# Altium PCB PCB1.PcbDoc
Units mm, origin at the board's own origin, x right, y up, seen from the top; angles counter-clockwise.
Board outline 92.71 x 44.7 mm, 2 copper layers (Top Layer, Bottom Layer), stack 1.571 mm thick; 32 components, 36 nets, 220 pads, 9 vias.
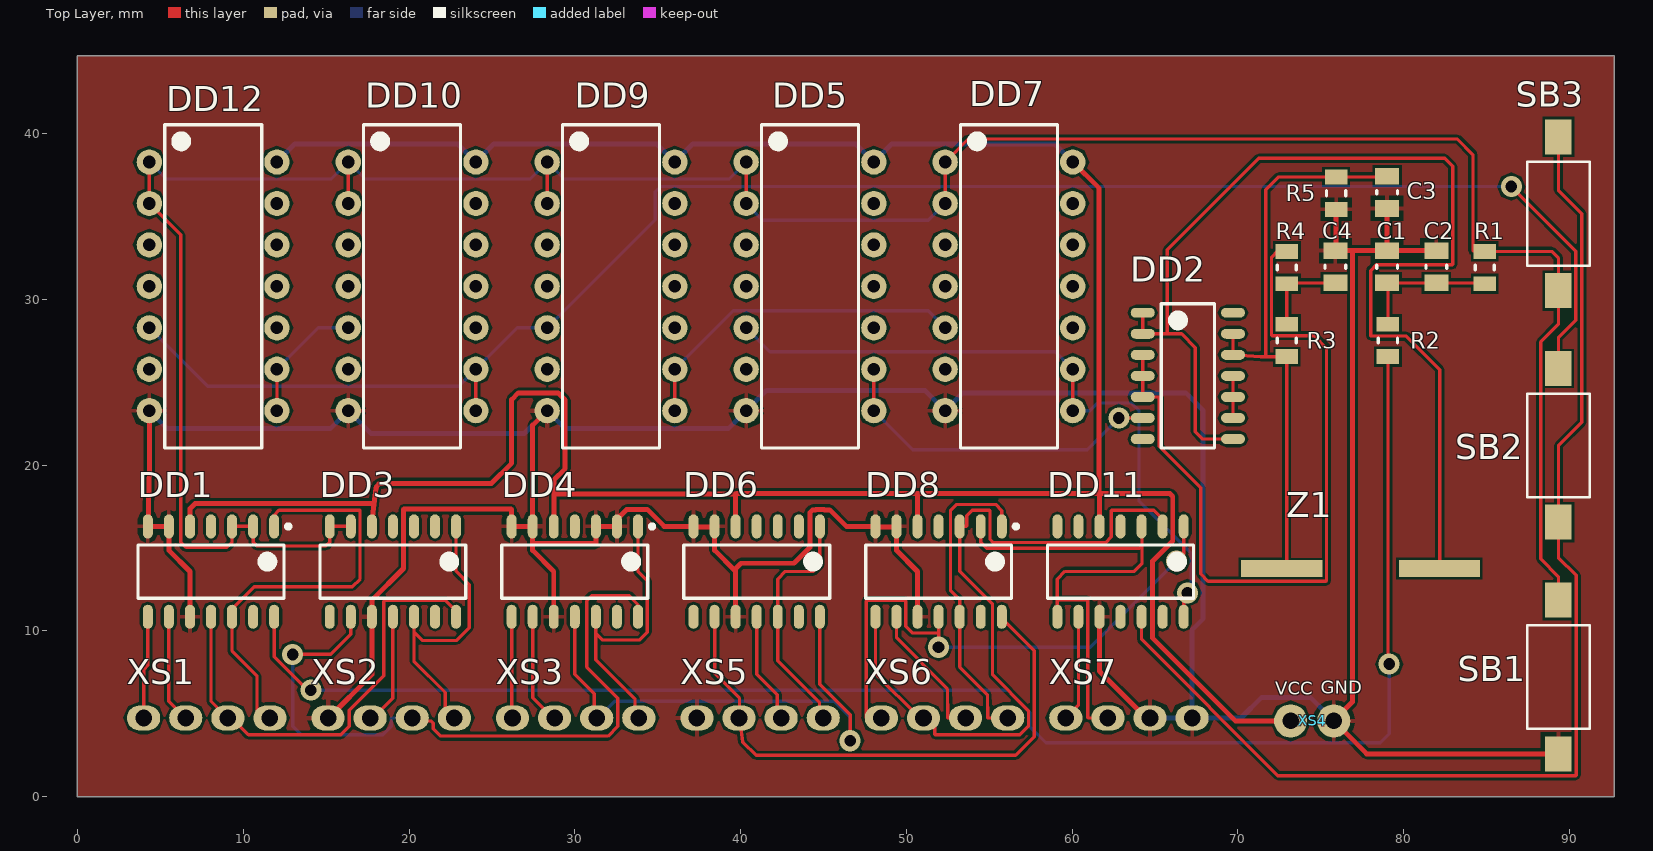
[diagram p0: Top Layer view]
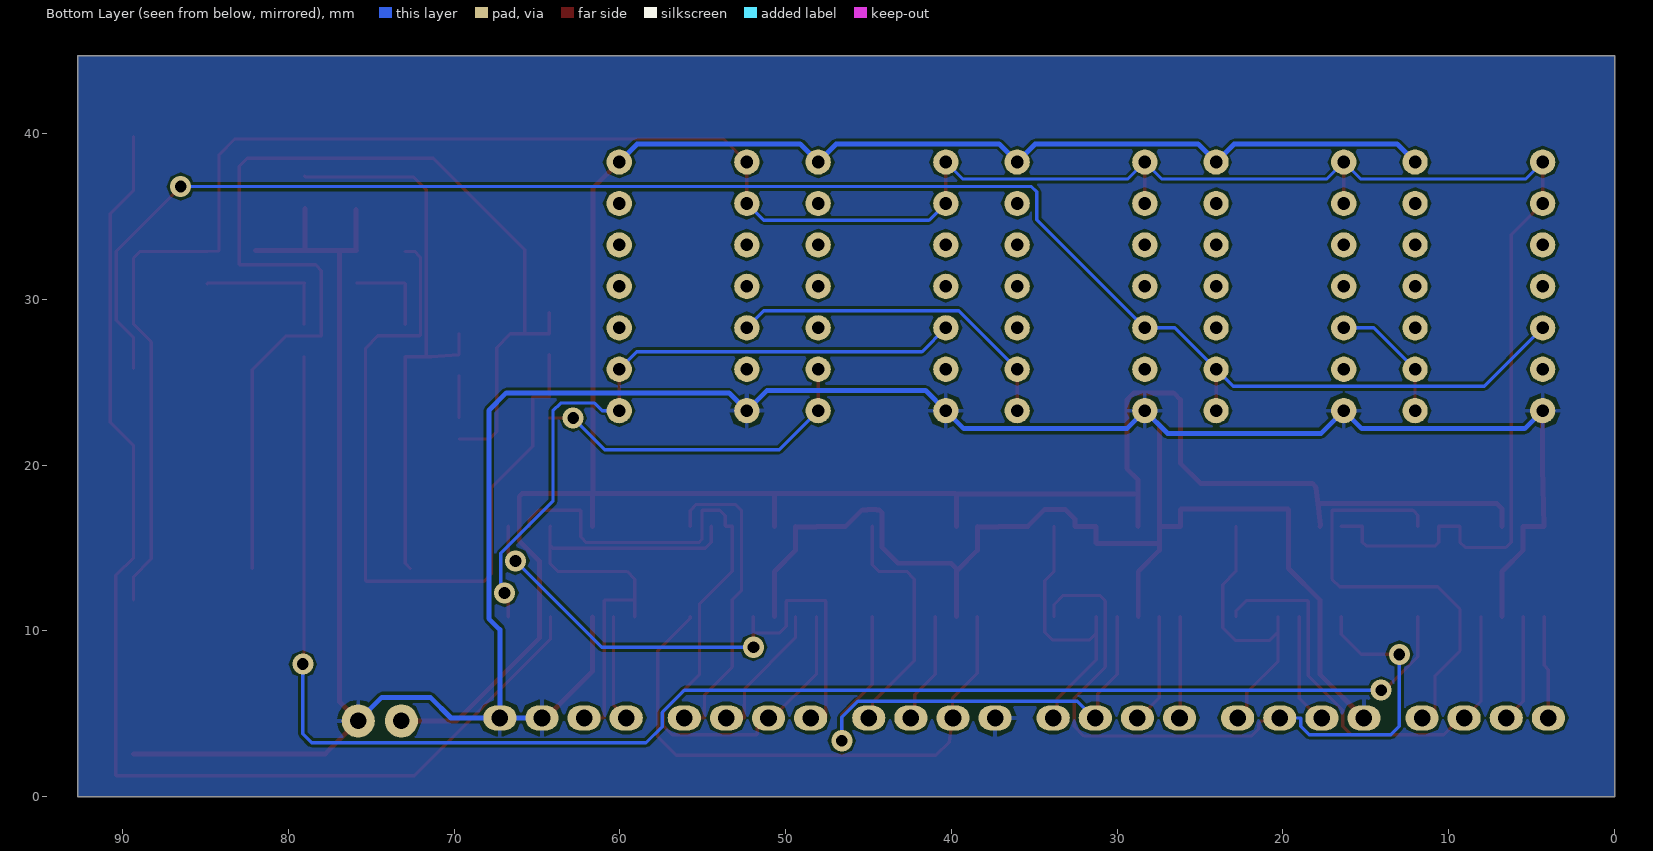
[diagram p1: Bottom Layer view, seen from below]
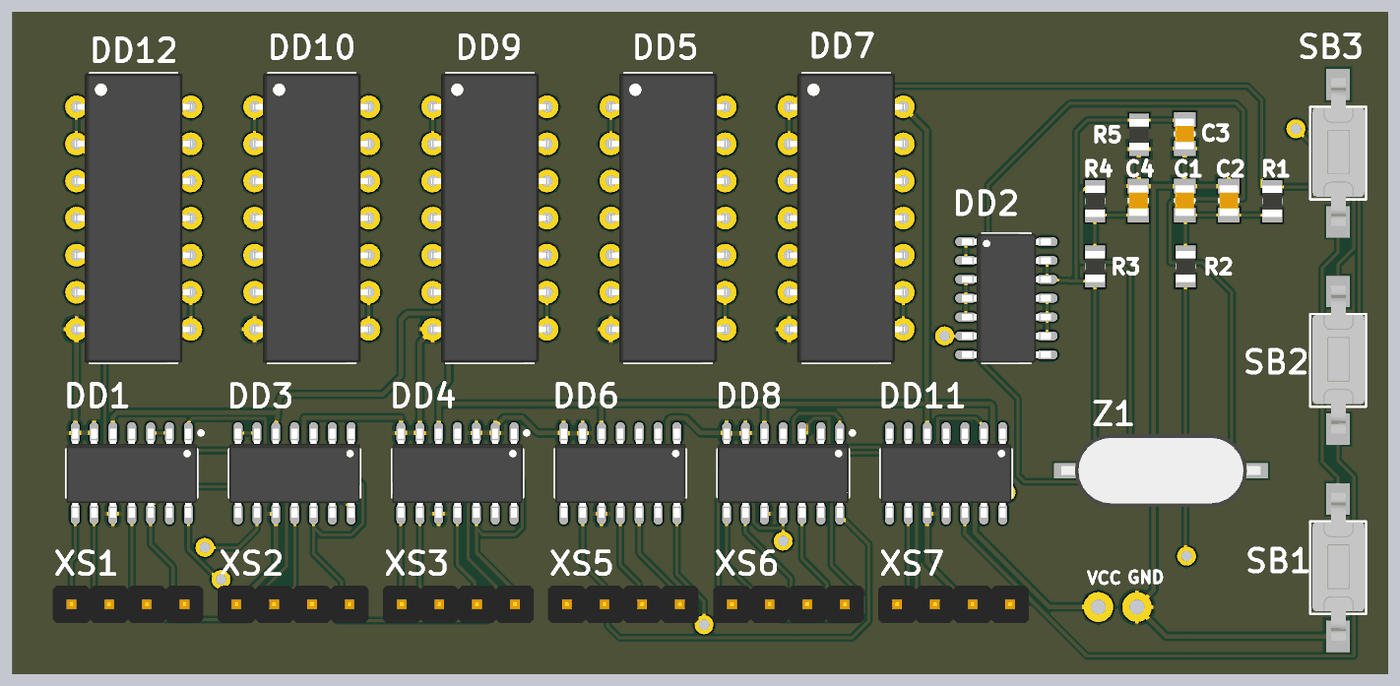
[diagram p2: 3D render of the assembled board from above, using the file's embedded part models]

## Layer stack, top to bottom
Top Solder: solder mask 0.0102, Solder Resist, Dk 3.5
Top Layer: signal copper 0.0356
Dielectric 1: dielectric 1.5, FR-4, Dk 4.8
Bottom Layer: signal copper 0.0356
Bottom Solder: solder mask 0.0102, Solder Resist, Dk 3.5

## Board outline
-0.002,-0.002 92.709,-0.002 92.709,44.703 -0.002,44.703 -0.002,0.072

## Design rules (kind name [scope] priority, off if disabled: settings)
Clearance [All] p1: gap=0.15 ignorepadtopadclearanceinfootprint=FALSE
ComponentClearance [All] p1: gap=0 collisioncheckmode=3 verticalgap=0 showdistances=FALSE
HoleSize [All] p1: absolutevalues=TRUE maxlimit=3 minlimit=0.5 maxpercent=80.000 minpercent=20.000
PolygonConnect [All] p1: connectstyle=Relief reliefconductorwidth=0.254 reliefentries=4 polygonreliefangle="90 Angle" airgapwidth=0.254
RoutingVias [All] p1: holewidth=0.5 width=0.8 viastyle="Through Hole" minholewidth=0.4 minwidth=0.4 maxholewidth=0.6 maxwidth=0.6
SilkToSilkClearance [All] p1: silktosilkclearance=0
SilkToSolderMaskClearance [All] p1: minsilkscreentomaskgap=0 clearancetoexposedcopper=TRUE
SolderMaskExpansion [All] p1: expansion=0.102 istentingtop=FALSE
Width Width_VCC_GND [InNetClass('VCC_GND')] p1: maxlimit=0.3 minlimit=0.3 preferedwidth=0.3
Width [All] p2: maxlimit=0.25 minlimit=0.15 preferedwidth=0.2
26 further rules are at their usual default settings.

## Classes and differential pairs
net class VCC_GND: GND VCC

## Components (designator, comment, footprint, x,y, rotation, side; value= is the part's Value field where it differs from the comment)
C1 "C-0805 16 В 0,033 мкФ 5% X5R Jiayang" C0805 78.995,31.969 r90 top value="0,033 мкФ"
C2 "C-0805 16 В 0,033 мкФ 5% X5R Jiayang" C0805 81.966,31.969 r90 top value="0,033 мкФ"
C3 "C-0805 16 В 91 мкФ 5% X5R Jiayang" C0805 78.995,36.459 r270 top value="0,033 мкФ"
C4 "C-0805 16 В 0,047 мкФ 5% X5R Jiayang" C0805 75.87,31.969 r90 top value="0,033 мкФ"
DD1 "K155ИЕ2 Ukraine" SN7490A 8.052,13.582 r270 top
DD2 "K155ЛА3 Ukraine" CD4011 66.98,25.385 r0 top
DD3 "K155ИЕ4 Ukraine" SN7492A 19.025,13.582 r270 top
DD4 "K155ИЕ2 Ukraine" SN7490A 29.997,13.582 r270 top
DD5 "K155ИЕ1 Ukraine" К155ИЕ1 44.183,30.785 r0 top
DD6 "K155ИЕ4 Ukraine" SN7492A 40.97,13.582 r270 top
DD7 "K155ИЕ1 Ukraine" К155ИЕ1 56.185,30.785 r0 top
DD8 "K155ИЕ2 Ukraine" SN7490A 51.943,13.582 r270 top
DD9 "K155ИЕ1 Ukraine" К155ИЕ1 32.182,30.785 r0 top
DD10 "K155ИЕ1 Ukraine" К155ИЕ1 20.18,30.785 r0 top
DD11 "K155ИЕ5 Ukraine" SN7493 62.916,13.582 r270 top
DD12 "K155ИЕ1 Ukraine" К155ИЕ1 8.179,30.785 r0 top
R1 "R-0805 0,125 Вт 6,8 кОм 5% Vishay" R0805 84.887,31.919 r270 top value="6,8 кОм"
R2 "R-0805 0,125 Вт 6,8 кОм 5% Vishay" R0805 79.045,27.524 r270 top value="6,8 кОм"
R3 "R-0805 0,125 Вт 2 кОм 5% Vishay" R0805 72.949,27.524 r270 top value="6,8 кОм"
R4 "R-0805 0,125 Вт 2 кОм 5% Vishay" R0805 72.949,31.919 r270 top value="6,8 кОм"
R5 "R-0805 0,125 Вт 2 кОм 5% Vishay" R0805 75.92,36.409 r90 top value="6,8 кОм"
SB1 "TS3611-2.5-180-B KLS" SWITCH 89.332,2.591 r90 top
SB2 "TS3611-2.5-180-B KLS" SWITCH 89.332,16.561 r90 top
SB3 "TS3611-2.5-180-B KLS" SWITCH 89.332,30.531 r90 top
XS1 "Pins" PINS 7.798,4.75 r180 top
XS2 "Pins" PINS 18.923,4.75 r180 top
XS3 "Pins" PINS 30.048,4.75 r180 top
XS4 "Power" POWER 74.477,4.572 r0 top
XS5 "Pins" PINS 41.173,4.75 r180 top
XS6 "Pins" PINS 52.299,4.75 r180 top
XS7 "Pins" PINS 63.424,4.75 r0 top
Z1 "SIT1579AC-J3-33E-0001.000000 3.3V 1kHz SiTime" QUARTZ 77.394,13.767 r0 top value=1kHz

## Footprints (in the part's own frame and the unit in brackets; to place one, negate y for a bottom-side part, rotate by r counter-clockwise, add the part's x,y. Pads: shape width x height; smd on the part's side, far side on the other; paste and mask are expansions set on the pad)
C0805 [mm] "Chip Capacitor, 2-Leads, Body 2,10x1,30mm, IPC Medium Density"
  rect 1x1.45 smd: 1(-0.975,0) 2(0.975,0)
  silkscreen extent -0.1,-0.63 0.1,0.63, body extent -1.05,-0.65 1.05,0.65, height 0.4
CD4011 [mm] "SOIC, 14-Leads, Body 8,62x3,90mm, Pitch 1,27mm, IPC Medium Density"
  oval 1.45x0.6 smd: 1(-2.725,3.81) 2(-2.725,2.54) 3(-2.725,1.27) 4(-2.725,0) 5(-2.725,-1.27) 6(-2.725,-2.54) 7(-2.725,-3.81) 8(2.725,-3.81) 9(2.725,-2.54) 10(2.725,-1.27) 11(2.725,0) 12(2.725,1.27) 13(2.725,2.54) 14(2.725,3.81)
  silkscreen extent -1.6,-4.35 1.6,4.35, body extent -3,-4.35 3,4.35, height 1.75
PINS [mm]
  oval 2x1.524 hole 1: 1(-3.81,0) 2(-1.27,0) 3(1.27,0) 4(3.81,0)
  body extent -5.08,-1.27 5.08,1.27, height 8.89
POWER [mm]
  round 2 hole 1: 1(-1.3,0) 2(1.3,0)
QUARTZ [mm]
  rect 4.896x1.01 smd paste+0 mask+0: 1(-4.758,0) 2(4.758,0)
  body extent -6.71,-2.45 6.71,2.45, height 4.34
R0805 [mm] "Chip Resistor, 2-Leads, Body 2,10x1,30mm, IPC Medium Density"
  rect 0.9x1.35 smd: 1(-0.975,0) 2(0.975,0)
  silkscreen extent -0.15,-0.58 0.15,0.58, body extent -1.05,-0.65 1.05,0.65, height 0.4
SN7490A [mm] "SOIC, 14-Leads, Body 8,65x3,90mm, Pitch 1,27mm, IPC Medium Density"
  oval 1.45x0.6 smd: 1(-2.725,3.81) 2(-2.725,2.54) 3(-2.725,1.27) 4(-2.725,0) 5(-2.725,-1.27) 6(-2.725,-2.54) 7(-2.725,-3.81) 8(2.725,-3.81) 9(2.725,-2.54) 10(2.725,-1.27) 11(2.725,0) 12(2.725,1.27) 13(2.725,2.54) 14(2.725,3.81)
  silkscreen extent -2.85,-4.4 1.6,4.79, body extent -3,-4.4 3,4.4, height 1.75
SN7492A [mm] "SOIC, 14-Leads, Body 8,65x3,90mm, Pitch 1,27mm, IPC Medium Density"
  oval 1.45x0.6 smd: 1(-2.725,3.81) 2(-2.725,2.54) 3(-2.725,1.27) 4(-2.725,0) 5(-2.725,-1.27) 6(-2.725,-2.54) 7(-2.725,-3.81) 8(2.725,-3.81) 9(2.725,-2.54) 10(2.725,-1.27) 11(2.725,0) 12(2.725,1.27) 13(2.725,2.54) 14(2.725,3.81)
  silkscreen extent -1.6,-4.4 1.6,4.4, body extent -3,-4.4 3,4.4, height 1.75
SN7493 [mm] "SOIC, 14-Leads, Body 8,65x3,90mm, Pitch 1,27mm, IPC Medium Density"
  oval 1.45x0.6 smd: 1(-2.725,3.81) 2(-2.725,2.54) 3(-2.725,1.27) 4(-2.725,0) 5(-2.725,-1.27) 6(-2.725,-2.54) 7(-2.725,-3.81) 8(2.725,-3.81) 9(2.725,-2.54) 10(2.725,-1.27) 11(2.725,0) 12(2.725,1.27) 13(2.725,2.54) 14(2.725,3.81)
  silkscreen extent -1.6,-4.4 1.6,4.4, body extent -3,-4.4 3,4.4, height 1.75
SWITCH [mil]
  rect 83x63 smd paste+0 mask+0: 1(0,0) 2(365,0)
  silkscreen extent 59,-74 306,74, body extent -11,-70 381,68, height 173
К155ИЕ1 [mil] "SOP, 14-Leads, Body 19,50x6,60mm, Pitch 2,50mm, IPC Medium Density"
  round 60 hole 30: 1(-151.57,295.28) 2(-151.57,196.85) 3(-151.57,98.43) 4(-151.57,0) 5(-151.57,-98.43) 6(-151.57,-196.85) 7(-151.57,-295.28) 8(151.57,-295.28) 9(151.57,-196.85) 10(151.57,-98.43) 11(151.57,0) 12(151.57,98.43) 13(151.57,196.85) 14(151.57,295.28)
  silkscreen extent -115,-384 115,384, body extent -156,-384 156,384, height 140

## Part data
C1 C2 C3 C4: library part C0805, Manufacturer=Jiayang, Package=C-0805, Temp_Coef=X5R, Tolerance=5%, Voltage="16 В"
DD1 DD4 DD8: library part SN7490A, Manufacturer=Ukraine, Name=K155ИЕ2
DD2: library part CD4011, Manufacturer=Ukraine, Name=K155ЛА3
DD3 DD6: library part SN7492A, Manufacturer=Ukraine, Name=K155ИЕ4
DD5 DD7 DD9 DD10 DD12: library part К155ИЕ1, Manufacturer=Ukraine, Name=K155ИЕ1
DD11: library part SN7493, Manufacturer=Ukraine, Name=K155ИЕ5
R1 R2 R3 R4 R5: library part R0805, Manufacturer=Vishay, Power="0,125 Вт", Tolerance=5%, Packege=R-0805
SB1 SB2 SB3: library part SWITCH, Manufacturer=KLS, Name=TS3611-2.5-180-B
Z1: library part Quartz, Manufacturer=SiTime, Voltage=3.3V, Name=SIT1579AC-J3-33E-0001.000000

## Via types
v1: diameter 1.27, hole 0.711, Top Layer to Bottom Layer, 9 vias

## Nets (pads, with @x,y where several pads share a name; then routed paths per layer and width w, separated by ;. In a path a pad name is that pad's centre, name@x,y a point inside that pad or via, vN(x,y) a via of type N, cw(c..) or ccw(c..) an arc to the next point about the centre after c; other vN are vias at no path point)
GND: C1.2 C2.2 C3.2 C4.2 DD1.6 DD1.7 DD1.10 DD3.10 DD4.2 DD4.3 DD4.6 DD4.7 DD4.10 DD5.7 DD6.6 DD6.7 DD6.10 DD7.7 DD8.6 DD8.7 DD8.10 DD9.7 DD10.7 DD11.10 DD12.7 R5.1 SB1.1 XS2.4 XS4.2 XS5.4 XS7.3 XS7.4 | length 250.3
  Top Layer w0.3: DD12.7 4.329,19.874 DD1.7 DD1.6 5.512,14.859 6.782,13.589 DD1.10 ; XS2.4 15.139,4.75 17.755,7.366 DD3.10 17.755,11.862 19.66,13.767 19.66,17.323 19.685,17.348 26.162,17.348 26.187,17.323 DD4.7 DD4.6 ; DD9.7 27.457,22.41 DD4.6 ; DD4.10 28.727,13.589 27.457,14.859 27.457,15.291 ; DD6.6 DD6.6@38.43,16.282 ; DD6.10 39.7,13.589 ; DD8.6 DD8.6@49.403,16.282 ; DD8.10 50.673,13.589 49.403,14.859 DD8.6@49.403,16.282 ; DD11.10 61.646,7.569 64.465,4.75 XS7.3 ; R5.1 75.92,32.994 C4.2 76.886,32.944 ; C3.2 C1.2 ; C2.2 C1.2 ; SB1.1 77.763,2.591 75.773,4.581 76.911,5.72 76.911,32.918 76.886,32.944 ; 27.457,15.291 DD4.6 ; 27.457,15.291 27.483,15.265 31.242,15.265 31.267,15.291 DD4.3 DD4.2 32.537,16.739 33.127,17.328 33.555,17.328 33.559,17.332 34.366,17.332 35.391,16.307 DD6.7 37.16,16.282 DD6.6@38.43,16.282 ; DD6.6@38.43,16.282 38.43,14.859 39.611,13.678 39.7,13.589 ; 39.7,13.589 39.7,13.767 40.018,14.084 43.218,14.084 44.171,15.037 44.171,17.133 44.346,17.308 44.508,17.308 44.532,17.332 45.029,17.332 45.052,17.308 45.369,17.308 46.371,16.307 DD8.7 48.133,16.282 DD8.6@49.403,16.282 ; 76.886,32.944 C1.2
  Bottom Layer w0.3: DD12.7 5.414,22.2 15.245,22.2 DD10.7 17.695,21.92 26.967,21.92 DD9.7 29.417,22.2 39.248,22.2 DD5.7 41.56,24.511 51.109,24.511 DD7.7 53.409,24.359 66.84,24.359 67.897,23.302 67.897,10.743 67.234,10.079 XS7.4 ; XS7.3 XS7.4 ; XS4.2@75.773,4.581 74.36,5.994 71.425,5.994 70.18,4.75 XS7.4
NetC1_1: C1.1 C2.1 R1.2 R2.1 | length 8.4
  Top Layer w0.2: R2.1 79.045,30.944 C1.1 C2.1 84.837,30.994 R1.2
NetC3_1: C3.1 DD2.12 DD2.13 R3.2 R5.2 Z1.1 | length 35.2
  Top Layer w0.2: DD2.13 DD2.12 71.378,26.549 71.706,26.549 ; Z1.1 72.949,14.08 R3.2 71.706,26.549 ; C3.1 78.945,37.384 R5.2 72.449,37.384 71.674,36.609 71.674,26.581 71.706,26.549
NetC4_1: C4.1 R3.1 R4.2 | length 5.4
  Top Layer w0.2: R3.1 R4.2 72.999,30.994 C4.1
NetDD1_1: DD1.1 DD1.12 XS1.1 | length 26.6
  Top Layer w0.2: XS1.1 10.832,4.75 10.832,7.278 9.322,8.788 DD1.12 9.322,11.328 10.668,12.675 16.586,12.675 17.043,13.132 17.043,17.256 17.018,17.282 12.151,17.282 11.862,16.993 DD1.1
NetDD1_2: DD1.2 DD1.3 DD3.6 DD3.7 DD5.1 DD5.2 DD7.1 DD7.2 DD9.1 DD9.2 DD10.1 DD10.2 DD12.1 DD12.2 R1.1 SB1.2 SB3.1 | length 164.1
  Top Layer w0.2: DD12.1 4.329,35.785 6.223,33.891 6.223,15.354 6.54,15.037 9.004,15.037 9.322,15.354 DD1.3 DD1.2 10.592,15.354 10.821,15.125 14.985,15.125 15.215,15.354 DD3.7 DD3.6 ; DD10.2@16.33,35.785 DD10.1 ; DD9.2@28.332,35.785 DD9.1 ; DD5.2@40.333,35.785 DD5.1 ; DD7.2@52.335,35.785 DD7.1 53.725,39.675 83.236,39.675 84.176,38.735 84.176,32.919 R1.1 88.937,32.894 89.332,32.499 SB3.1 89.332,28.499 88.265,27.432 88.265,14.347 89.332,13.281 SB1.2
  Bottom Layer w0.2: DD12.1 5.352,37.262 15.307,37.262 DD10.1 17.353,37.262 27.309,37.262 DD9.1 29.355,37.262 39.31,37.262 DD5.1 ; DD5.2@40.333,35.785 41.346,34.773 51.323,34.773 DD7.2@52.335,35.785
NetDD1_8: DD1.8 XS1.4 | length 6.2
  Top Layer w0.2: XS1.4 3.988,7.671 4.242,7.925 DD1.8
NetDD1_9: DD1.9 XS1.3 | length 6.5
  Top Layer w0.2: DD1.9 5.512,5.766 XS1.3
NetDD1_11: DD1.11 DD3.14 XS1.2 | length 27.9
  Top Layer w0.2: DD1.11 8.052,5.766 XS1.2 9.296,4.75 10.313,3.734 15.875,3.734 16.383,4.242 16.383,5.207 18.466,7.29 18.466,11.781 18.517,11.832 22.204,11.832 22.835,11.201 DD3.14
NetDD1_14: DD1.14 R2.2 | length 95.3
  Top Layer w0.2: DD1.14 11.862,8.451 13.887,6.426 v1(14.072,6.426) ; R2.2 79.045,8.077 v1(79.121,8.001)
  Bottom Layer w0.2: v1(14.072,6.426) 56.102,6.426 57.442,5.086 57.442,4.229 58.42,3.251 78.588,3.251 79.121,3.785 v1(79.121,8.001)
NetDD2_1: DD2.1 DD2.2 DD2.8 Z1.2 | length 69.1
  Top Layer w0.2: DD2.2 DD2.1 ; DD2.2 65.735,27.925 ; DD2.8 67.869,21.575 67.427,22.017 67.427,27.097 66.598,27.925 65.735,27.925 ; Z1.2 82.169,13.767 82.169,25.768 80.15,27.788 78.029,27.788 78.003,27.813 78.003,31.737 78.346,32.08 82.931,32.08 82.956,32.106 82.956,38.024 82.474,38.506 71.247,38.506 65.735,32.995 65.735,27.925
NetDD2_3: DD2.3 DD2.4 DD2.5 R4.1 | length 46.5
  Top Layer w0.2: DD2.3 DD2.5 65.227,24.115 65.253,24.089 65.253,21.133 67.754,18.631 67.754,13.437 68.186,13.005 75.311,13.005 75.336,13.03 75.336,27.062 74.6,27.799 72.06,27.799 72.024,27.835 72.024,32.553 72.365,32.894 R4.1
NetDD2_6: DD2.6 DD5.8 DD5.9 | length 20.5
  Top Layer w0.2: DD5.8 DD5.9@48.033,25.785 ; v1(62.814,22.845) DD2.6
  Bottom Layer w0.2: DD5.8 50.389,20.93 60.899,20.93 v1(62.814,22.845)
NetDD2_9: DD2.9 DD2.10 DD2.11 | length 2.5
  Top Layer w0.2: DD2.9 DD2.11
NetDD3_1: DD3.1 DD3.12 XS2.1 | length 17.8
  Top Layer w0.2: DD3.12 20.295,9.957 ; XS2.1 22.186,4.75 22.186,6.287 20.295,8.179 20.295,9.957 ; DD3.1 22.835,13.589 23.625,12.798 23.625,10.189 22.86,9.423 20.828,9.423 20.295,9.957
NetDD3_9: DD3.9 DD4.14 XS2.2 | length 43.4
  Top Layer w0.2: v1(12.979,8.585) 15.278,8.585 16.485,9.792 DD3.9 ; XS2.2 20.38,4.563 21.346,4.563 21.463,4.446 21.463,4.102 21.907,3.658 32.004,3.658 32.588,4.242 32.588,5.944 30.709,7.823 30.709,11.811 31.039,12.141 33.261,12.141 33.807,11.595 DD4.14
  Bottom Layer w0.2: v1(12.979,8.585) 12.979,4.242 13.487,3.734 18.415,3.734 18.923,4.242 18.923,4.725 XS2.2
NetDD3_11: DD3.11 XS2.3 | length 6.8
  Top Layer w0.2: XS2.3 17.831,4.75 19.025,5.944 DD3.11
NetDD4_1: DD4.1 DD4.12 XS3.1 | length 17.4
  Top Layer w0.2: DD4.12 31.267,9.855 ; DD4.1 33.807,13.589 34.366,13.03 34.366,9.919 33.896,9.449 31.674,9.449 31.267,9.855 ; XS3.1 33.63,4.75 33.63,5.893 31.267,8.255 31.267,9.855
NetDD4_8: DD4.8 XS3.4 | length 6.1
  Top Layer w0.2: DD4.8 26.187,4.801 XS3.4
NetDD4_9: DD4.9 XS3.3 | length 6.7
  Top Layer w0.2: DD4.9 27.457,5.969 28.676,4.75 XS3.3
NetDD4_11: DD4.11 DD6.14 XS3.2 | length 32.5
  Top Layer w0.2: DD4.11 29.997,7.391 31.166,6.223 31.166,4.75 XS3.2 ; DD6.14 44.78,6.782 46.609,4.953 v1(46.609,3.378)
  Bottom Layer w0.2: XS3.2 31.395,4.75 32.41,5.766 45.637,5.766 46.609,4.794 v1(46.609,3.378)
NetDD5_5: DD5.5 DD7.8 DD7.9 DD11.14 | length 41.5
  Top Layer w0.2: DD7.8 DD7.9@60.035,25.785 ; DD11.14 66.726,12.065 v1(66.954,12.294)
  Bottom Layer w0.2: DD5.5 41.77,26.848 58.972,26.848 DD7.9@60.035,25.785 ; DD7.8 61.062,23.285 61.526,23.749 63.576,23.749 64.033,23.292 64.033,17.831 67.179,14.685 67.179,12.518 v1(66.954,12.294)
NetDD6_1: DD6.1 DD6.12 XS5.1 | length 14.9
  Top Layer w0.2: DD6.1 44.78,13.995 44.374,13.589 42.697,13.589 42.24,13.132 DD6.12 42.24,8.204 44.755,5.69 44.755,4.75 XS5.1
NetDD6_9: DD6.9 DD8.14 XS5.3 | length 34.6
  Top Layer w0.2: DD6.9 38.43,7.455 39.929,5.956 XS5.3@39.929,4.75 ; XS5.3 XS5.3@39.929,4.75 ; DD8.14 55.753,10.77 57.709,8.814 57.709,3.62 56.583,2.493 40.928,2.493 40.132,3.289 XS5.3@39.929,4.75
NetDD6_11: DD6.11 XS5.2 | length 6.9
  Top Layer w0.2: DD6.11 40.97,7.391 42.215,6.147 42.215,4.75 XS5.2
NetDD7_5: DD7.5 DD9.8 DD9.9 | length 20.7
  Top Layer w0.2: DD9.8 DD9.9@36.032,25.785
  Bottom Layer w0.2: DD9.9@36.032,25.785 39.559,29.312 51.308,29.312 DD7.5
NetDD8_1: DD8.1 DD8.12 XS6.1 | length 19
  Top Layer w0.2: DD8.1 55.753,17.259 55.38,17.632 53.03,17.632 52.654,17.256 52.654,12.446 53.213,11.887 DD8.12 53.213,7.823 54.889,6.147 54.915,4.75 XS6.1
NetDD8_2: DD8.2 DD11.3 DD11.8 XS7.2 | length 31.1
  Top Layer w0.2: DD8.2 54.483,15.342 54.843,14.982 64.037,14.982 64.21,15.155 ; DD11.8 59.106,11.836 ; XS7.2 60.96,4.75 60.935,4.775 60.935,11.836 60.909,11.862 59.131,11.862 59.106,11.836 ; DD11.3 64.21,16.282 64.21,15.155 ; 59.106,11.836 59.106,13.132 59.563,13.589 63.741,13.589 64.21,14.058 64.21,15.155
NetDD8_3: DD8.3 DD8.8 DD11.2 XS6.3 | length 46
  Top Layer w0.2: DD8.8 48.133,7.417 50.8,4.75 XS6.3 51.714,4.75 51.714,3.759 51.74,3.734 56.851,3.734 57.359,4.242 57.359,5.194 55.194,7.359 55.194,11.608 53.213,13.589 DD8.3 53.619,16.307 53.645,16.332 53.645,16.952 53.975,17.282 55.016,17.282 55.042,17.256 55.042,15.535 55.245,15.332 62.017,15.332 62.357,15.672 62.357,17.256 62.382,17.282 64.913,17.282 65.456,16.739 DD11.2
NetDD8_9: DD8.9 XS6.2 | length 8.4
  Top Layer w0.2: DD8.9 49.403,9.576 52.476,6.502 52.502,4.75 XS6.2
NetDD8_11: DD8.11 DD11.1 XS6.4 | length 34.7
  Top Layer w0.2: XS6.4 47.574,4.75 47.574,11.811 47.6,11.836 49.936,11.836 49.962,11.811 49.962,10.274 50.355,9.881 51.918,9.881 51.943,9.906 ; v1(51.943,9.017) 51.943,9.906 ; DD8.11 51.943,9.906 ; v1(66.294,14.224) 66.726,14.656 DD11.1
  Bottom Layer w0.2: v1(51.943,9.017) 61.087,9.017 v1(66.294,14.224)
NetDD9_5: DD9.5 DD10.8 DD10.9 DD12.5 SB2.2 | length 105.1
  Top Layer w0.2: DD10.8 DD10.9@24.03,25.785 ; v1(86.487,36.805) 90.382,32.91 90.382,28.736 89.332,27.686 SB2.2
  Bottom Layer w0.2: DD12.5 7.849,24.765 23.011,24.765 24.03,25.785 26.53,28.285 DD9.5 34.849,34.802 34.849,36.487 35.166,36.805 v1(86.487,36.805)
NetDD10_5: DD10.5 DD12.8 DD12.9 | length 7.8
  Top Layer w0.2: DD12.8 DD12.9@12.029,25.785
  Bottom Layer w0.2: DD12.9@12.029,25.785 14.529,28.285 DD10.5
NetDD11_9: DD11.9 XS7.1 | length 6.4
  Top Layer w0.2: XS7.1 60.376,5.512 DD11.9
NetDD11_12: DD11.12 SB2.1 SB3.2 | length 71.1
  Top Layer w0.2: DD11.12 64.186,9.487 72.403,1.27 90.373,1.27 90.399,1.295 90.399,13.357 89.332,14.424 SB2.1 89.332,21.184 90.732,22.584 90.732,35.179 89.332,36.579 SB3.2
VCC: DD1.5 DD3.5 DD4.5 DD5.14 DD6.5 DD7.14 DD8.5 DD9.14 DD10.14 DD11.5 DD12.14 XS4.1 | length 173.8
  Top Layer w0.3: DD1.5 6.782,17.374 7.09,17.682 17.819,17.682 ; DD3.5 17.722,16.349 17.887,17.673 18.002,18.586 18.032,18.667 18.041,18.727 18.217,18.903 24.973,18.903 26.187,20.117 26.187,23.952 26.594,24.359 28.981,24.359 29.413,23.927 29.413,19.787 28.742,19.116 28.742,18.201 ; DD4.5 28.742,16.322 28.742,18.201 ; 39.693,18.23 39.746,18.283 50.673,18.283 ; DD6.5 39.693,16.314 39.693,18.258 28.799,18.258 28.742,18.201 ; DD8.5 50.673,18.286 61.704,18.286 65.89,18.286 66.065,18.11 66.065,15.426 64.856,14.216 64.856,9.566 69.841,4.581 XS4.1@73.173,4.581 ; DD7.14 61.625,36.694 61.625,18.286 ; DD11.5 61.646,18.286
  Bottom Layer w0.3: DD12.14 13.114,39.37 22.945,39.37 DD10.14 25.116,39.37 34.947,39.37 DD9.14 37.117,39.37 46.948,39.37 DD5.14 49.119,39.37 58.95,39.37 DD7.14
pads on no net: DD1.4 DD1.13 DD2.7 DD2.14 DD3.2 DD3.3 DD3.4 DD3.8 DD3.13 DD4.4 DD4.13 DD5.3 DD5.4 DD5.6 DD5.10 DD5.11 DD5.12 DD5.13 DD6.2 DD6.3 DD6.4 DD6.8 DD6.13 DD7.3 DD7.4 DD7.6 DD7.10 DD7.11 DD7.12 DD7.13 DD8.4 DD8.13 DD9.3 DD9.4 DD9.6 DD9.10 DD9.11 DD9.12 DD9.13 DD10.3 DD10.4 DD10.6 DD10.10 DD10.11 DD10.12 DD10.13 DD11.4 DD11.6 DD11.7 DD11.11 DD11.13 DD12.3 DD12.4 DD12.6 DD12.10 DD12.11 DD12.12 DD12.13

## Polygon pours and split planes (outlines as drawn)
GND on Top Layer "GND_L01_P000" (solid, pour order 0): 92.71,0 92.71,44.704 0,44.704 0,0
GND on Bottom Layer "GND_L02_P001" (solid, pour order 1): 0.004,0.009 0.004,44.713 92.714,44.713 92.714,0.009

## Silkscreen, mask and mechanical layers (free items; w line width, h text height)
Top Overlay:
  text "GND" at 74.981,6.198 h0.8
  text "VCC" at 72.263,6.147 h0.8
Drill Drawing:
  circle w0.254: c9.833,-30.613 r1.86
  lines w0.254: 7.973,-24.103 11.693,-24.103 11.693,-20.384 7.973,-20.384 7.973,-24.103 ; 7.973,-12.014 11.693,-12.014 9.833,-15.734 7.973,-12.014
  lines w0.5: -3.45,-9.875 96.668,-9.875 ; 22.306,-34.984 22.306,-1.506 ; 41.881,-34.984 41.881,-1.506 ; 70.015,-34.984 70.015,-1.506 ; -3.45,-34.984 96.668,-34.984 96.668,-1.506 -3.45,-1.506 -3.45,-34.984
  text "Позначення" at 1.572,-7.364 h4.8
  text "Кількість" at 24.817,-7.364 h4.8
  text "Розмір" at 44.392,-7.364 h4.8
  text "Металізація" at 72.526,-7.364 h4.8
  text "9" at 31.275,-15.734 h4
  text "0,71mm (28,00mil)" at 44.577,-15.734 h4
  text "PTH" at 79.34,-15.734 h4
  text "26" at 30.375,-24.103 h4
  text "1,00mm (39,37mil)" at 44.981,-24.103 h4
  text "PTH" at 79.34,-24.103 h4
  text "70" at 30.531,-32.473 h4
  text "0,76mm (30,00mil)" at 44.392,-32.473 h4
  text "PTH" at 79.34,-32.473 h4